# Allegro board LightningOutput.brd
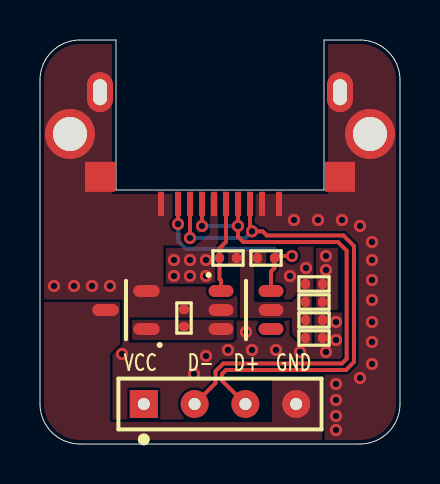
[diagram p0: board, top side]
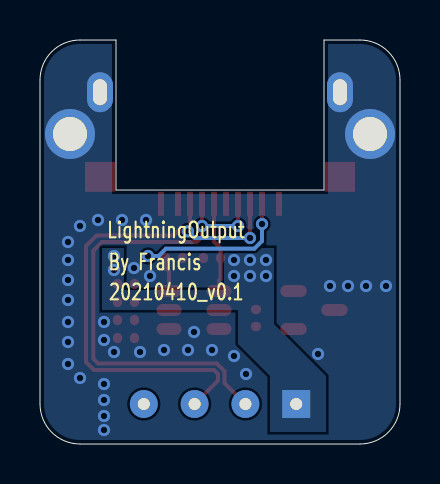
[diagram p1: board, bottom side, seen from below]

Outline 18 x 20.2 mm; copper layers: TOP, BOTTOM. Coordinates in mm from the lower left corner of the outline.
Outline path: 0,18.2 arc(0.59,19.61) 2,20.2 3.8,20.2 3.8,12.7 14.2,12.7 14.2,20.2 16,20.2 arc(17.41,19.61) 18,18.2 18,2 arc(17.41,0.59) 16,0 2,0 arc(0.59,0.59) 0,2 0,18.2

## Design rules (mm)
constraint set DEFAULT: min track width 0.127

## Placement (name value [footprint] x y rotation side)
C1  0.1uF  [D-0402-C]  13.7 5.3 0 top
C2  10uF  [D-0402-C]  13.7 8 180 top
J1  USB 4/SM  [2P54PITCH4PIN]  5.19 2 0 top
J2  Lightning 8/SM  [LIGHTNING_8_6P_SMT]  11.95 12.61 180 top
J3  CON1  [PAD_SMD_1R7]  1.5 15.5 0 top
J4  CON1  [PAD_SMD_1R7]  16.5 15.5 0 top
Q1  MOSFET N  [SOT95P237X112-3N]  4.3 6.7 180 top
R1  2K  [D-0402-R]  9.4 9.3 180 top
R2  2K  [D-0402-R]  11.3 9.3 0 top
R3  200  [D-0402-R]  13.7 7.1 0 top
R4  2K  [D-0402-R]  13.7 6.2 0 top
R5  10K  [D-0402-R]  7.2 6.3 90 top
U1  -  [360A0]  10.3 6.7 0 top

## Library data of the parts
C1 C2 = CAP NP
J1 = HEADER 4/SM
J2 = CONN SOCKET 14/SM_2
J3 J4 = CON1
Q1 = MOSFET N_0
R1-R5 = R
U1 = 360A0

## Footprints (pads in the part's own frame, mm; a bottom-side part is the same pattern mirrored in y, then rotated)
2P54PITCH4PIN
  rect 1.4x1.4 hole 0.6: 1(0,0)
  round 1.4 hole 0.6: 2(2.54,0) 3(5.08,0) 4(7.62,0)
360A0
  oval 1.25x0.6 smd: 1(-1.25,0.95) 2(-1.25,0) 3(-1.25,-0.95) 4(1.25,-0.95) 5(1.25,0) 6(1.25,0.95)
D-0402-C
  oval 0.465x0.52 smd: 1(-0.425,0) 2(0.425,0)
D-0402-R
  oval 0.465x0.52 smd: 1(-0.425,0) 2(0.425,0)
LIGHTNING_8_6P_SMT
  rect 0.3x1.2 smd: 1(0.85,0.6) 2(1.45,0.6) 3(2.05,0.6) 4(2.65,0.6) 5(3.25,0.6) 6(3.85,0.6) 7(4.45,0.6) 8(5.05,0.6) M1(0,0.6) M2(5.9,0.6)
  rect 1.5x1.5 smd: M3(-3.05,-0.75) M4(8.95,-0.75)
  oval 1.3x2 hole 0.7x1.3: M5(-3.05,-4.98) M6(8.95,-4.98)
PAD_SMD_1R7
  round 2.5 hole 1.7: 1(0,0)
SOT95P237X112-3N
  oval 1.325x0.6 smd: 1(-1.022,0.95) 2(-1.022,-0.95) 3(1.022,0)

## Nets
GND: J1.4 Q1.3
GND_SIGNAL: C1.2 C2.2 J2.1 J2.M1 J2.M2 J2.M3 J2.M4 J2.M5 J2.M6 J3.1 J4.1 Q1.2(SOURCE) R4.2 R5.2 U1.2
VCC: C2.1 J1.1 J2.5(PWR) R3.2
D+: J1.3 J2.2 J2.7
D-: J1.2 J2.3 J2.6
ID0: J2.4 R1.2 U1.1
ID1: J2.8 R2.2 U1.6
N454896: C1.1 R1.1 R2.1 R3.1 R4.1 U1.5(VDD)
N455766: Q1.1 R5.1 U1.3

Pads without a net: U1 4

## Via types
v1: diameter 0.61, hole 0.33, TOP to BOTTOM, 47 vias

## Routing (per net, layer and track width the routed paths; a pad name or vN(x,y) marks a point on that pad's centre or on a via; arc(x,y) is an arc through that point)
GND_SIGNAL:
  vias: v1(0.7,7.9) v1(1.7,7.9) v1(2.6,7.9) v1(3.5,7.9) v1(4.1,4.5) v1(7.7,3.5) v1(8.3,4.4) v1(9.4,4.7) v1(10.3,5.6) v1(10.6,4.7) v1(11.8,4.7) v1(12.5,8.4) v1(12.7,11.2) v1(13,4.6) v1(13.3,8.8) v1(13.9,11.2) v1(14.3,4.6) v1(14.8,6.1) v1(14.8,5.2) v1(14.8,3) v1(14.8,2.2) v1(14.8,1.4) v1(14.8,0.7) v1(15.1,11.2) v1(16,10.9) v1(16,3.3) v1(16.6,10.1) v1(16.6,9.2) v1(16.6,8.2) v1(16.6,7.2) v1(16.6,6.1) v1(16.6,5.1) v1(16.6,4)
VCC:
  vias: v1(6.7,9.2) v1(6.7,8.4) v1(7.5,9.2) v1(7.5,8.4) v1(8.3,9.2) v1(8.3,8.4) v1(14.3,9.4) v1(14.3,8.7)
D+: length 26.4
  TOP w0.2: J2.7 v1(7.5,10.3) ; J2.2 10.5,10.73 v1(10.6,10.63) 11.13,10.63 11.34,10.43 15.17,10.43 15.7,9.9 15.7,4.1 15.3,3.7 9.3,3.7 9.1,3.5 9.1,3.17 J1.3
  BOTTOM w0.2: v1(10.6,10.63) 10.27,10.3 v1(7.5,10.3)
D-: length 24.6
  TOP w0.2: J2.6 v1(8.1,10.9) ; J1.2 8.77,3.04 8.77,3.64 9.16,4.03 15.1,4.03 15.33,4.26 15.33,9.67 14.9,10.1 10.17,10.1 9.9,10.37 v1(9.9,10.9) J2.3
  BOTTOM w0.2: v1(8.1,10.9) v1(9.9,10.9)
ID0: length 4.5
  TOP w0.2: U1.1 9.05,8.18 8.97,8.25 R1.2 8.97,9.79 9.3,10.11 J2.4
ID1: length 10.5
  TOP w0.2: v1(12.6,9.4) 11.82,9.4 11.72,9.3 11.72,8.8 11.55,8.62 U1.6 ; J2.8 v1(6.9,11)
  BOTTOM w0.2: v1(12.6,9.4) 12.07,9.4 11.7,9.77 7.28,9.77 6.9,10.15 v1(6.9,11)

## Copper pours and planes (outline as drawn; the poured copper is in the pictures)
GND on TOP: 0.2,7.1 4,7.1 4,5 3.5,4.5 3.5,1.1 11.6,1.1 11.6,3.3 14.1,3.3 14.1,0.2 2,0.2 0.73,0.73 0.2,2
GND_SIGNAL on TOP: 14.4,20 16,20 17.27,19.47 17.8,18.2 17.8,2 17.27,0.73 16,0.2 2,0.2 0.73,0.73 0.2,2 0.2,18.2 0.73,19.47 2,20 3.6,20 3.6,12.5 14.4,12.5 ; 3 cut-outs
GND_SIGNAL on BOTTOM: 14.4,20 16,20 17.27,19.47 17.8,18.2 17.8,2 17.27,0.73 16,0.2 2,0.2 0.73,0.73 0.2,2 0.2,18.2 0.73,19.47 2,20 3.6,20 3.6,12.5 14.4,12.5
VCC on TOP: 13.8,9.8 13.8,6.7 14.9,6.7 14.9,9.8
VCC on TOP: 8.9,12.5 8.9,8 6.3,8 6.3,9.8 7.63,9.8 8.5,10.54 8.5,12.5
VCC on BOTTOM: 3.7,0.6 6.5,0.6 6.5,3.4 8.1,5 8.1,6.7 14.9,6.7 14.9,9.8 13.8,9.8 13.8,7.7 8.8,7.7 8.8,9.8 6.3,9.8 6.3,6 3.7,3.4
N454896 on TOP: 11.3,9.7 11.3,8.9 10.7,8.9 10.7,7.1 12.6,7.1 12.9,7.4 13.6,7.4 13.6,5 13.1,5 12.6,5.5 12.6,6.3 10,6.3 10,8.9 9.4,8.9 9.4,9.7
N455766 on TOP: 9.7,6.2 4.6,6.2 4.6,5.2 9.6,5.2 9.7,5.3

## Text on the board
Ref Des/Silkscreen Bottom: 20210410_v0.1 | By Francis | LightningOutput
Ref Des/Silkscreen Top: VCC | D- | D+ | GND
